# Altium PCB PCB_chushi_waigou_3_2022-06-16.pcbdoc
Units mil, origin at the board's own origin, x right, y up, seen from the top; angles counter-clockwise.
Board outline 3937 x 3149.6 mil, 2 copper layers (Top Layer, Bottom Layer); 26 components, 19 nets, 120 pads, 14 vias.
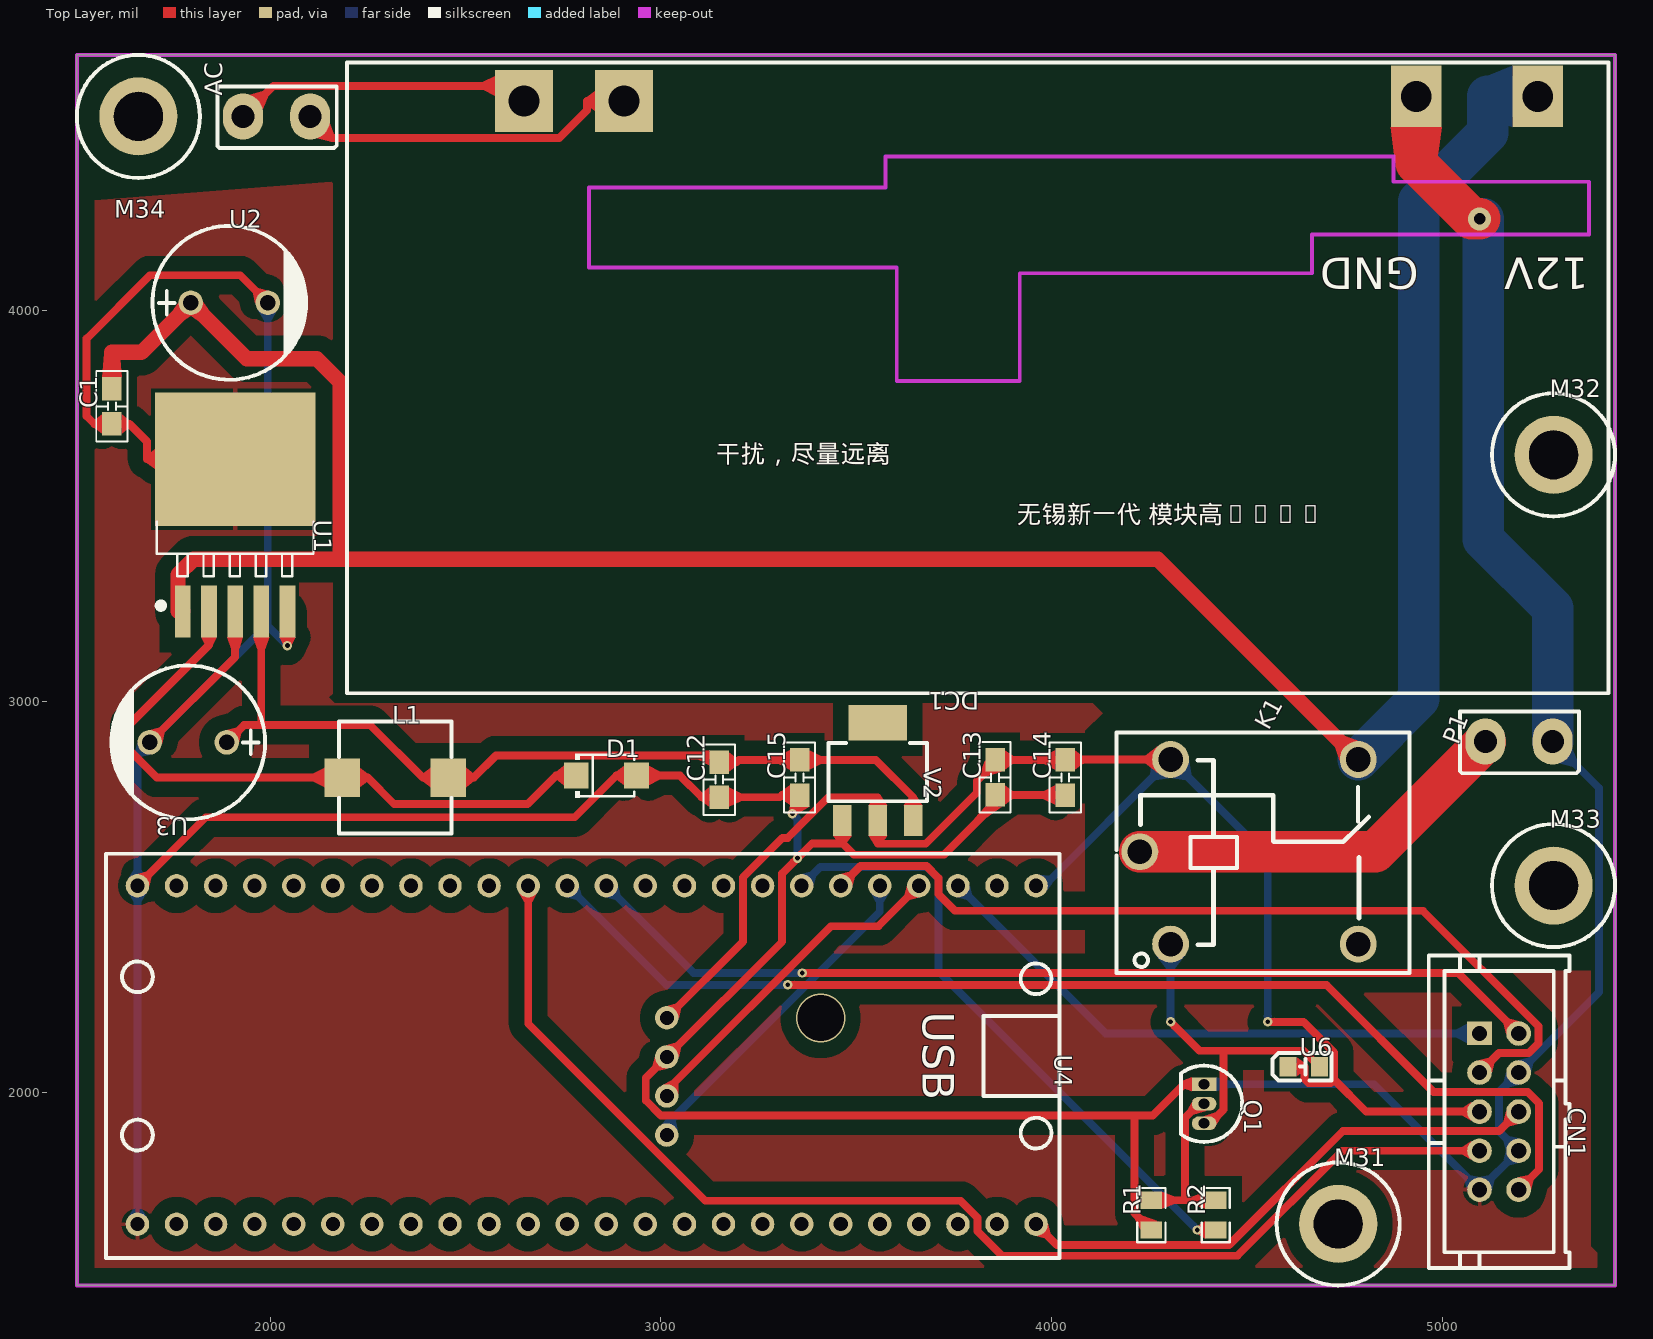
[diagram p0: Top Layer view]
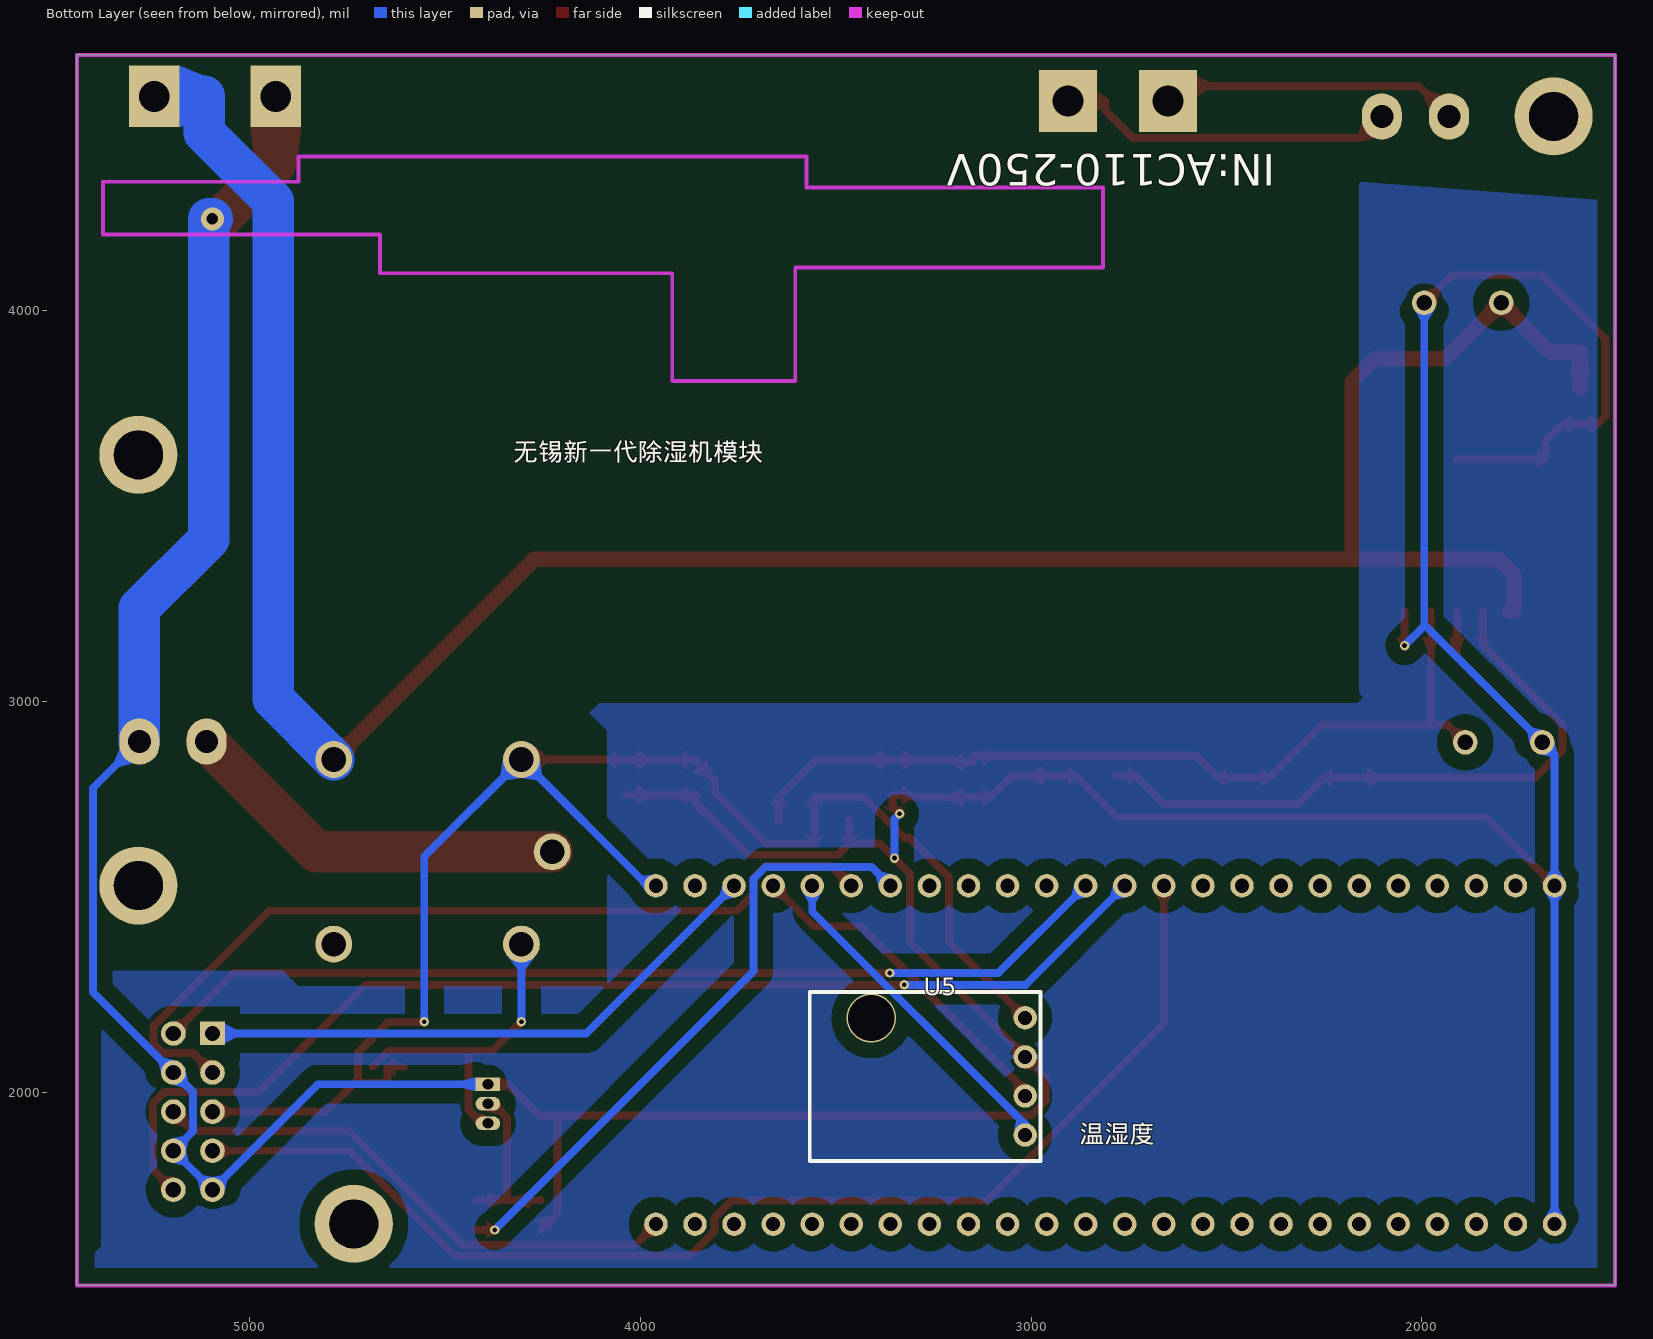
[diagram p1: Bottom Layer view, seen from below]

## Layer stack, top to bottom
Top Solder: solder mask 0.4, Solder Resist, Dk 3.5
Top Layer: signal copper 1.4
Dielectric1: dielectric 12.6, FR-4, Dk 4.8
Bottom Layer: signal copper 1.4
Bottom Solder: solder mask 0.4, Solder Resist, Dk 3.5

## Board outline
1505,1505 1505,4654.6 5442,4654.6 5442,1505

## Design rules (kind name [scope] priority, off if disabled: settings)
Clearance [InPoly] p1: gap=40 ignorepadtopadclearanceinfootprint=FALSE except(0: Arc-Hole Track-Hole SMDPad-Hole THPad-Hole Via-Hole Fill-Hole Poly-Hole Region-Hole Text-Hole)
PolygonConnect [All] p1: connectstyle=Relief reliefconductorwidth=10 reliefentries=4 polygonreliefangle="90 Angle" airgapwidth=10
RoutingVias [All] p1: holewidth=28 width=50 viastyle="Through Hole" minholewidth=28 minwidth=50 maxholewidth=28 maxwidth=50
SolderMaskExpansion [All] p1: expansion=4 istentingtop=FALSE
Width [All] p1: maxlimit=10 minlimit=10 preferedwidth=10
30 further rules are at their usual default settings.

## Components (designator, comment, footprint, x,y, rotation, side; value= is the part's Value field where it differs from the comment)
AC "220V" OUT 1930,4495 r90 top
C1 "0.1uF" 0805-C 1595,3710 r90 top
C12 "10uF" 0805-C 3149.46,2754.63 r90 top
C13 "10uF" 0805-C 3855.45,2760.37 r90 top
C14 "0.1uF" 0805-C 4035,2760 r90 top
C15 "0.1uF" 0805-C 3355,2760 r90 top
CN1 "5103308-1" IDC-TH_5103308-1 5145,1950 r270 top
D1 "SS54LF" SMAF_L3.5-W2.6-LS4.7-RD 2860,2810 r0 top
DC1 "电源19005" ?#1 5425,4635 r180 top
K1 "SRD-03VDC-SL-C_C496430" RELAY-TH_SRD-03VDC-SL-C 4505,2615 r0 top
L1 "CD74R-33UH" IND-SMD_L7.3-W7.3 2320,2805 r0 top
M31 "NO" M3X8+6_L 4733.34,1662.48 r0 top
M32 "NO" M3X8+6_L 5284.52,3630.98 r0 top
M33 "NO" M3X8+6_L 5284.52,2528.62 r0 top
M34 "NO" M3X8+6_L 1662.48,4497.12 r0 top
P1 "12V用电器" OUT 5110,2895 r90 top
Q1 "S8050-TA" TO-92-3_L4.9-W3.7-P1.27-L 4390,1970 r270 top
R1 "10kΩ" R0805 4255,1685 r90 top
R2 "1kΩ" R0805 4420,1685 r90 top
U1 "LM2596S-5.0/TR_C459077" TO-263-5_L10.1-W8.7-P1.70-LS14.4-BR 1910,3425 r270 top
U2 "电解电容/680UF" CAP-TH_BD10.0-P5.00-D0.6-FD 1895,4020 r0 top
U3 "电解电容/220UF" CAP-TH_BD10.0-P5.00-D0.6-FD 1790,2895 r180 top
U4 "W806核心板" ?#2 3960,2095 r270 top
U5 "NO" AHT10 3015,2040 r0 bottom
U6 "0805LED_G" LED-SMD_L2.0-W1.3-R-RD 4645,2065 r0 top
V2 "AMS1117-3V3" PG-SOT223-4_L6.5-W3.5-P2.30-LS7.0-BR 3555,2820 r270 top

## Footprints (in the part's own frame and the unit in brackets; to place one, negate y for a bottom-side part, rotate by r counter-clockwise, add the part's x,y. Pads: shape width x height; smd on the part's side, far side on the other; paste and mask are expansions set on the pad)
0805-C [mil]
  rect 60x50 smd: 1(0.08,0.45) 2(90.08,0.45)
  silkscreen extent -45,-40 135,40
AHT10 [mil]
  round 60 hole 36: 1(0,-150) 2(0,-50) 3(0,50) 4(0,150)
  silkscreen extent -39,-217 551,217
CAP-TH_BD10.0-P5.00-D0.6-FD [mm]
  round 1.6 hole 1: 1(-2.5,0) 2(2.5,0)
  silkscreen extent -5,-5 5.08,5
IDC-TH_5103308-1 [mm]
  rect 1.524x1.6 hole 1: 1(-5.08,-1.27)
  round 1.6 hole 1: 2(-5.08,1.27) 3(-2.54,-1.27) 4(-2.54,1.27) 5(0,-1.27) 6(0,1.27) 7(2.54,-1.27) 8(2.54,1.27) 9(5.08,-1.27) 10(5.08,1.27)
  silkscreen extent -10.16,-4.57 10.16,4.57
IND-SMD_L7.3-W7.3 [mm]
  rect 2.3x2.5 smd: 1(-3.45,0) 2(3.45,0)
  silkscreen extent -3.65,-3.65 3.65,3.65
LED-SMD_L2.0-W1.3-R-RD [mm]
  rect 1.1x1.25 smd: 1(1.016,0) 2(-1.016,0)
  silkscreen extent -2.03,-0.89 1.8,0.89
M3X8+6_L [mil]
  round 200 hole 125 slot 125.2 at 0 deg: 1(0,0)
  silkscreen extent -158,-157 157,157
OUT [mm]
  oval 3x2.6 hole 1.5: GND(0.051,-4.369) VCC(0.051,0)
  silkscreen extent -2.01,-6.1 2.01,1.65
PG-SOT223-4_L6.5-W3.5-P2.30-LS7.0-BR [mm]
  rect 2x1.2 smd: 1(3.175,-2.3) 2(3.175,0) 3(3.175,2.3)
  rect 2.3x3.8 smd: 4(-3.175,0)
  silkscreen extent -1.87,-3.2 1.93,3.2
R0805 [mil]
  rect 44.59x54.21 smd: 1(-38.04,0) 2(38.04,0)
  silkscreen extent -69,-36 69,36
RELAY-TH_SRD-03VDC-SL-C [mm]
  round 2.4 hole 1.6: 1(-5.1,-6) 2(7.1,-6) 3(7.1,6) 4(-5.1,6) 5(-7.1,0)
  silkscreen extent -8.61,-7.87 10.44,7.75
SMAF_L3.5-W2.6-LS4.7-RD [mm]
  rect 1.6x1.7 smd: 1(-1.96,0) 2(1.96,0)
  silkscreen extent -2.01,-1.43 1.83,1.42
TO-92-3_L4.9-W3.7-P1.27-L [mm]
  rect 0.9x1.6 hole 0.7: 1(-1.27,0)
  oval 0.9x1.6 hole 0.7: 2(0,0) 3(1.27,0)
  silkscreen extent -2.48,-1.5 2.48,2.48
TO-263-5_L10.1-W8.7-P1.70-LS14.4-BR [mm]
  rect 3.359x1.02 smd: 1(4.948,-3.4) 2(4.948,-1.7) 3(4.948,0) 4(4.948,1.7) 5(4.948,3.4)
  rect 8.7x10.431 smd: 6(-4.948,0)
  silkscreen extent -0.88,-5.09 4.77,5.09
?#1 [mm]
  rect 3.8x4 smd: 1(70.5,2.5) 2(64,2.5)
  rect 3.8x4 smd far side: 1(70.5,2.5) 2(64,2.5)
  rect 3.3x4 smd: 3(4.6,2.2) 4(12.5,2.2)
  rect 3.3x4 smd far side: 3(4.6,2.2) 4(12.5,2.2)
  Keep-Out Layer lines w0.254: 66.271,13.335 66.271,8.128 46.99,8.128 46.99,6.096 13.97,6.096 13.97,7.747 1.27,7.747 1.27,11.176 19.271,11.176 19.271,13.698 38.27,13.698 38.27,20.698 46.271,20.698 46.271,13.335 66.271,13.335
  silkscreen extent 0,0 82,41
?#2 [mm]
  round 1.524 hole 0.914: 1(-11,0) 2(-11,-2.54) 3(-11,-5.08) 4(-11,-7.62) 5(-11,-10.16) 6(-11,-12.7) 7(-11,-15.24) 8(-11,-17.78) 9(-11,-20.32) 10(-11,-22.86) 11(-11,-25.4) 12(-11,-27.94) 13(-11,-30.48) 14(-11,-33.02) 15(-11,-35.56) 16(-11,-38.1) 17(-11,-40.64) 18(-11,-43.18) 19(-11,-45.72) 20(-11,-48.26) 21(-11,-50.8) 22(-11,-53.34) 23(-11,-55.88) 24(-11,-58.42) 25(11,-58.42) 26(11,-55.88) 27(11,-53.34) 28(11,-50.8) 29(11,-48.26) 30(11,-45.72) 31(11,-43.18) 32(11,-40.64) 33(11,-38.1) 34(11,-35.56) 35(11,-33.02) 36(11,-30.48) 37(11,-27.94) 38(11,-25.4) 39(11,-22.86) 40(11,-20.32) 41(11,-17.78) 42(11,-15.24) 43(11,-12.7) 44(11,-10.16) 45(11,-7.62) 46(11,-5.08) 47(11,-2.54) 48(11,0)
  silkscreen extent -13.08,-60.45 13.21,1.52

## Via types
v1: diameter 24.02, hole 12.01, Top Layer to Bottom Layer, 8 vias
v2: diameter 98.43, hole 78.74, Top Layer to Bottom Layer, 4 vias
v3: diameter 125.98, hole 118.11, Top Layer to Bottom Layer, 1 vias
v4: diameter 59.06, hole 29.53, Top Layer to Bottom Layer, 1 vias

## Nets (pads, with @x,y where several pads share a name; then routed paths per layer and width w, separated by ;. In a path a pad name is that pad's centre, name@x,y a point inside that pad or via, vN(x,y) a via of type N, cw(c..) or ccw(c..) an arc to the next point about the centre after c; other vN are vias at no path point)
3.3V: C13.2 C14.2 CN1.5 K1.4 U4.1 U5.1 U6.2 V2.2 | length 3955.7
  Top Layer w20: U5.1 3209.99,2384.99 3209.99,2549.44 3311.14,2650.59 3324.53,2650.59 3428.34,2754.4 3555,2754.4 3555,2716.21 V2.2 3555,2635.6 3677.79,2635.6 3808,2765.81 3808,2795.87 3862.58,2850.45 C13.2@3877.52,2850.45 ; C13.2@3855,2850.45 C13.2@3877.52,2850.45 ; K1.4 4080.72,2851.22 4079.58,2850.08 4057.07,2850.08 C14.2 3900.4,2850.08 3900.03,2850.45 C13.2@3877.52,2850.45 ; v1(4552.71,2179.7) 4644.24,2179.7 4722.71,2101.23 4722.71,2032.12 ; U6.2 4646.68,2065 4646.68,2033.74 4657.61,2022.81 4713.4,2022.81 4722.71,2032.12 ; CN1.5 4804.83,1950 4722.71,2032.12
  Bottom Layer w20: U4.1 3981.07,2528.07 K1.4 4552.71,2602.73 v1(4552.71,2179.7)
12V: C1.2 DC1.3 K1.3 U1.1 U2.1 | length 6585.6
  Top Layer w39.37: C1.2 1594.55,3893.26 1669.84,3893.26 U2.1 1939.35,3877.23 2118.72,3877.23 2178.51,3817.44 2178.51,3363.68 ; U1.1 1763.78,3230.19 1763.8,3324.2 1803.3,3363.7 2178.5,3363.7 ; K1.3 4272.07,3363.68 2178.51,3363.68
  Bottom Layer w106.3: K1.3 4940,3006.7 4940,4280 5115.8,4455.8 5115.8,4548.4 ; 5115.76,4548.38 v2(5243.9,4548.39)
CLK: CN1.1 U4.3 | length 1491.6
  Bottom Layer w20: U4.3 4138.07,2150 CN1.1
DIO: CN1.3 U4.6 | length 2226
  Top Layer w20: U4.6 3510.64,2578.71 3679.36,2578.71 3710,2548.07 3710,2506.78 3752.65,2464.13 4949.97,2464.13 5245.74,2168.36 5245.74,2125.01 5220.73,2100 5145,2100 CN1.3
DOWN: CN1.10 U4.13 | length 2960.9
  Top Layer w20: v1(3324.66,2274.29) 4703.03,2274.29 4977.32,2000 5218.38,2000 5247.44,1970.94 5247.44,1802.44 CN1.10
  Bottom Layer w20: U4.13 3013.78,2274.29 v1(3324.66,2274.29)
GND: C1.1 C12.1 C13.1 C14.1 C15.1 CN1.4 CN1.8 CN1.9 D1.2 DC1.4 P1.GND Q1.1 R1.1 U1.3 U1.5 U1.6 U2.2 U3.2 U4.24 U4.25 U5.2 V2.1 | length 13727
  Top Layer w20: U4.24 1835.16,2703.23 2778.87,2703.23 2885.64,2810 D1.2 3048.69,2810 3103.98,2754.71 C12.1 3304.15,2754.71 3309.52,2760.08 C15.1 3354.55,2730.17 v1(3336.33,2711.95) ; U3.2 1910,3113.43 U1.3 ; U1.6 1684.63,3619.82 1684.63,3665.03 1639.58,3710.08 1617.07,3710.08 C1.1 1549.52,3710.08 1530,3729.6 1530,3928.4 1692.3,4090.7 1922.7,4090.7 U2.2 ; v1@2043.86,3142.81 U1.5 ; V2.1 3464.45,2636.57 ; C13.1@3855,2760.45 C13.1@3877.52,2760.45 ; C14.1 3900.4,2760.08 3900.03,2760.45 C13.1@3877.52,2760.45 ; R1.1 4211.83,1690.13 4211.83,1940 ; Q1.1 4338.47,2020 4258.47,1940 4211.83,1940 ; 3464.45,2636.57 3493.86,2607.16 3724.23,2607.16 C13.1@3877.52,2760.45 ; 3464.45,2636.57 3387.14,2636.57 v1(3349.42,2598.85) 3310,2559.43 3310,2385 U5.2 2961.06,2036.06 2961.06,1978.65 2999.71,1940 4211.83,1940
  Top Layer w106.3: v2(4932.87,4548.39) 4932.87,4377.13 5075,4235 v4(5095,4235)
  Bottom Layer w20: U4.25 U4.24 1660,2863.43 U3.2 1991.62,3195.05 ; U2.2 1993.43,3196.86 1991.62,3195.05 ; v1(2043.85,3142.81) 1991.62,3195.05 ; v1(3336.33,2711.95) 3349.42,2698.86 v1(3349.42,2598.85) ; Q1.1 4825,2020 CN1.9 CN1.8 5145,1900 5145,2000 CN1.4 5401.07,2256.07 5401.07,2777.93 P1.GND
  Bottom Layer w106.3: v4(5095,4235) 5105,4235 5105,3415 5282,3238 P1.GND
K1_1: K1.1 Q1.3 U6.1 | length 842.3
  Top Layer w20: v1(4304.22,2179.7) 4378.25,2105.67 4439.77,2105.67 ; Q1.3 4404.75,1920 4439.77,1955.02 4439.77,2105.67 ; U6.1 4644.33,2105.67 4439.77,2105.67
  Bottom Layer w20: v1(4304.22,2179.7) K1.1
K1_5: K1.5 P1.VCC | length 1001.3
  Top Layer w106.3: K1.5 4828,2615 P1.VCC
OK: CN1.7 U4.14 | length 3166
  Top Layer w20: U4.14 2660,2174.85 3113.17,1721.68 3766.77,1721.68 3810,1678.45 3810,1643.81 3872.94,1580.87 4475.24,1580.87 4744.37,1850 CN1.7
P2_GND: AC.GND DC1.2 | length 879.4
  Top Layer w20: AC.GND 2157.23,4441.77 2739.4,4441.77 2810.49,4512.86 2810.49,4536.57 2857.91,4536.57 v2(2905.32,4536.58)
P2_VCC: AC.VCC DC1.1 | length 767.9
  Top Layer w20: AC.VCC 2008.3,4575.3 2610.69,4575.3 v2(2649.41,4536.58)
Q1_2: Q1.2 R1.2 R2.2 | length 439.7
  Top Layer w20: R1.2 4341.22,1723.04 ; Q1.2 4377.22,1970 4341.22,1934 4341.22,1723.04 ; R2.2 4341.22,1723.04
RST: CN1.6 U4.48 | length 1398.5
  Top Layer w20: U4.48 4013.32,1608.61 4453.76,1608.61 4745.15,1900 5145,1900 CN1.6
U1_2: D1.1 L1.1 U1.2 | length 1670
  Top Layer w20: U1.2 1843.07,3144.05 1639.81,2940.79 1639.81,2874.69 1709.5,2805 L1.1 2249.48,2805 2317.46,2737.02 2658.33,2737.02 2731.31,2810 D1.1
U4_7: R2.1 U4.7 | length 1603.1
  Top Layer w20: v1(4372.86,1646.96) R2.1
  Bottom Layer w20: U4.7 3408.37,2576.44 3679.12,2576.44 3710,2545.56 3710,2309.82 v1(4372.86,1646.96)
U5_3: U4.4 U5.3 | length 876.3
  Top Layer w20: U5.3 3015,2004.31 3435.15,2424.46 3556.39,2424.46 U4.4
U5_4: U4.5 U5.4 | length 863.8
  Bottom Layer w20: U5.4 3015,1916.78 3560,2461.78 U4.5
UP: CN1.2 U4.12 | length 2491.6
  Top Layer w20: v1(3361.53,2304.61) 5040.39,2304.61 CN1.2
  Bottom Layer w20: U4.12 3083.46,2304.61 v1(3361.53,2304.61)
V2_3: C12.2 C15.2 L1.2 U1.4 U3.1 V2.3 | length 2267.7
  Top Layer w20: U3.1 1932.68,2939.26 1976.93,2939.26 ; U1.4 1976.93,2939.26 ; C12.2 C12.2@3163.04,2844.71 ; V2.3 3645.55,2754.4 3549.87,2850.08 C15.2 3199.41,2850.08 3194.04,2844.71 C12.2@3163.04,2844.71 ; 1976.93,2939.26 2256.26,2939.26 2390.52,2805 2423.18,2805 L1.2 2521.14,2805 2577.75,2861.61 3146.14,2861.61 C12.2@3163.04,2844.71
pads on no net: K1.2 M31.1 M32.1 M33.1 M34.1 U4.2 U4.8 U4.9 U4.10 U4.11 U4.15 U4.16 U4.17 U4.18 U4.19 U4.20 U4.21 U4.22 U4.23 U4.26 U4.27 U4.28 U4.29 U4.30 U4.31 U4.32 U4.33 U4.34 U4.35 U4.36 U4.37 U4.38 U4.39 U4.40 U4.41 U4.42 U4.43 U4.44 U4.45 U4.46 U4.47 V2.4
copper on no net:
  other v3: 3408.7,2189.61

## Polygon pours and split planes (outlines as drawn)
GND on Top Layer "GND_L01_P000" (solid, pour order 0): 1510,4280 1530,4260 1530,1520 5365,1520 5415,1570 5380,1605 5380,2310 4915,2310 4875,2270 4085,2270 4085,2925 4130,2970 4105,2995 2165,2995 2150,3010 2160,3020 2160,4330
GND on Bottom Layer "GND_L02_P001" (solid, pour order 1): 1510,4280.29 1530,4260.29 1530,1520.29 5365,1520.29 5415,1570.29 5380,1605.29 5380,2310.29 4915,2310.29 4875,2270.29 4085,2270.29 4085,2925.29 4130,2970.29 4105,2995.29 2165,2995.29 2150,3010.29 2160,3020.29 2160,4330.29

## Other copper
Top Layer:
  region net UP: 5163.57,2148.03 5196.97,2181.43 5171.75,2187.39 5157.61,2173.25
  region net DIO: 5093.03,2081.43 5126.43,2048.03 5132.39,2073.25 5118.25,2087.39
  region net 3.3V: 5074.17,1926.38 5074.17,1973.62 5052.12,1960 5052.12,1940
  region net RST: 5163.57,1951.97 5196.97,1918.57 5171.75,1912.61 5157.61,1926.75
  region net OK: 5074.17,1826.38 5074.17,1873.62 5052.12,1860 5052.12,1840
  region net DOWN: 5193.03,1781.43 5226.43,1748.03 5232.39,1773.25 5218.25,1787.39
  region net 3.3V: 4272.97,2815.79 4272.97,2886.65 4239.9,2861.22 4239.9,2841.22
  region net 12V: 4787.49,2898.37 4737.37,2848.26 4725.13,2882.79 4752.97,2910.62
  region net GND: 1962,4018.03 1995.4,4051.43 1970.18,4057.39 1956.04,4043.25
  region net 12V: 1765.15,4021.97 1798.55,3988.57 1780.18,3975.76 1752.34,4003.6
  region net 12V: 1794.61,3988.57 1828.01,4021.97 1840.82,4003.6 1812.98,3975.76
  region net GND: 1689.6,2926.43 1723,2893.03 1728.96,2918.25 1714.82,2932.39
  region net V2_3: 1886.45,2926.43 1919.85,2893.03 1925.81,2918.25 1911.67,2932.39
  region net U5_3: 3630.06,2529.95 3661.88,2498.13 3638.19,2492.12 3624.05,2506.26
  region net DIO: 3458.12,2558.01 3489.94,2526.19 3495.95,2549.88 3481.81,2564.02
  region net OK: 2682.5,2508.23 2637.5,2508.23 2650,2487.23 2670,2487.23
  region net GND: 1658.12,2558.01 1689.94,2526.19 1695.95,2549.88 1681.81,2564.02
  region net RST: 3958.12,1631.99 3989.94,1663.81 3995.95,1640.12 3981.81,1625.98
  region net 3.3V: 3013.12,2219.94 3044.94,2188.12 3050.95,2211.81 3036.81,2225.95
  region net GND: 2985.06,2091.88 3016.88,2060.06 2993.19,2054.05 2979.05,2068.19
  region net GND: 3013.12,2119.94 3044.94,2088.12 3050.95,2111.81 3036.81,2125.95
  region net U5_3: 3044.47,1995.6 3005.76,2018.54 3026.95,2030.4 3044.7,2019.87
  region net P2_GND: 2872.78,4499.67 2872.77,4573.48 2838.32,4546.57 2838.32,4526.57
  region net P2_VCC: 2652.49,4585.7 2600.29,4533.5 2603.62,4568.23 2617.76,4582.37
  region net GND: 2052.86,3150.75 2034.85,3150.76 2033.86,3159.16 2053.86,3159.15
  region net GND: 3348.31,2711.2 3335.58,2723.94 3340.82,2730.58 3354.96,2716.44
  region net GND: 3361.4,2598.1 3348.67,2610.83 3353.91,2617.48 3368.05,2603.34
  region net GND: 3350.17,2586.87 3337.43,2599.6 3330.79,2594.36 3344.93,2580.22
  region net 3.3V: 4560.65,2170.69 4560.65,2188.71 4569.06,2189.7 4569.06,2169.7
  region net UP: 3369.47,2295.6 3369.47,2313.62 3377.88,2314.61 3377.88,2294.61
  region net DOWN: 3332.6,2265.28 3332.6,2283.3 3341.01,2284.29 3341.01,2264.29
  region net K1_1: 4316.2,2180.45 4303.47,2167.72 4308.71,2161.07 4322.85,2175.21
  region net U4_7: 4380.8,1637.95 4380.8,1655.97 4389.21,1656.96 4389.21,1636.96
  region net GND: 1619.55,3735.08 1619.55,3685.08 1639.58,3700.08 1639.58,3720.08
  region net GND: 1569.55,3685.08 1569.55,3735.08 1549.52,3720.08 1549.52,3700.08
  region net 12V: 1569.55,3830.08 1619.55,3830.08 1614.24,3889.14 1574.87,3889.14
  region net GND: 3174.01,2779.71 3174.01,2729.71 3204.01,2744.71 3204.01,2764.71
  region net GND: 3124.01,2729.71 3124.01,2779.71 3103.98,2764.71 3103.98,2744.71
  region net V2_3: 3174.01,2869.71 3174.01,2819.71 3194.04,2834.71 3194.04,2854.71
  region net V2_3: 3124.01,2836.61 3124.01,2874.71 3094.01,2871.61 3094.01,2851.61
  region net GND: 3880,2785.45 3880,2735.45 3900.03,2750.45 3900.03,2770.45
  region net GND: 3872.52,2730.45 3830,2730.45 3803.38,2700.45 3831.66,2700.45
  region net 3.3V: 3880,2875.45 3880,2825.45 3900.03,2840.45 3900.03,2860.45
  region net 3.3V: 3871.12,2820.45 3830,2848.9 3818.42,2820.43 3835.14,2808.87
  region net GND: 4009.55,2735.08 4009.55,2785.08 3979.55,2770.08 3979.55,2750.08
  region net 3.3V: 4059.55,2875.08 4059.55,2825.08 4079.58,2840.08 4079.58,2860.08
  region net 3.3V: 4009.55,2825.08 4009.55,2875.08 3979.55,2860.08 3979.55,2840.08
  region net GND: 3329.55,2735.08 3329.55,2785.08 3309.52,2770.08 3309.52,2750.08
  region net GND: 3379.46,2730.08 3329.55,2730.08 3329.26,2719.02 3350.47,2711.95
  region net V2_3: 3379.55,2875.08 3379.55,2825.08 3409.55,2840.08 3409.55,2860.08
  region net V2_3: 3329.55,2825.08 3329.55,2875.08 3299.55,2860.08 3299.55,2840.08
  region net GND: 2968.66,2835 2968.66,2785 2998.66,2800 2998.66,2820
  region net GND: 2905.67,2785 2905.67,2835 2885.64,2820 2885.64,2800
  region net U1_2: 2751.34,2785 2751.34,2835 2731.31,2820 2731.31,2800
  region net GND: 4997.83,4469.64 4867.91,4469.64 4879.72,4377.13 4986.02,4377.13
  region net P2_GND: 2830.52,4511.57 2830.52,4561.57 2810.49,4546.57 2810.49,4526.57
  region net P2_VCC: 2574.61,4550.3 2574.61,4600.3 2544.61,4585.3 2544.61,4565.3
  region net V2_3: 2410.55,2780 2410.55,2830 2390.52,2815 2390.52,2795
  region net V2_3: 2501.11,2830 2501.11,2780 2521.14,2795 2521.14,2815
  region net U1_2: 2138.89,2780 2138.89,2830 2108.89,2815 2108.89,2795
  region net U1_2: 2229.45,2830 2229.45,2780 2249.48,2795 2249.48,2815
  region net GND: 4358.51,2002.28 4358.51,2037.71 4338.47,2030 4338.47,2010
  region net Q1_2: 4282.1,1745.34 4282.1,1700.75 4312.1,1713.04 4312.1,1733.04
  region net GND: 4227.9,1647.17 4272.76,1669.25 4232.99,1683.12 4214.03,1673.79
  region net Q1_2: 4392.9,1700.75 4392.9,1745.34 4362.9,1733.04 4362.9,1713.04
  region net U4_7: 4392.9,1669.25 4392.9,1624.66 4372.86,1636.96 4372.86,1656.96
  region net GND: 1704.66,3594.82 1704.66,3644.82 1684.63,3629.82 1684.63,3609.82
  region net GND: 2023.78,3164.08 2063.94,3164.08 2053.86,3142.81 2033.86,3142.81
  region net V2_3: 1956.85,3164.08 1997.01,3164.08 1986.93,3134.08 1966.93,3134.08
  region net GND: 1889.92,3164.08 1930.08,3164.08 1920,3134.08 1900,3134.08
  region net U1_2: 1822.99,3164.08 1863.15,3164.08 1853.07,3144.05 1833.07,3144.05
  region net 3.3V: 4626.66,2040.39 4626.66,2089.61 4646.68,2075 4646.68,2055
  region net 3.3V: 3531.38,2734.37 3578.62,2734.37 3565,2754.4 3545,2754.4
  region net 3.3V: 3578.62,2655.63 3531.38,2655.63 3545,2635.6 3565,2635.6
  region net V2_3: 3621.93,2734.37 3669.17,2734.37 3655.55,2754.4 3635.55,2754.4
  region net GND: 3488.07,2655.63 3440.83,2655.63 3454.45,2636.57 3474.45,2636.57
  region net K1_5: 5161.18,2889.13 5058.82,2904.87 4962.07,2824.23 5031.86,2743.7
  region net P2_GND: 2152.18,4479.03 2119.63,4441.08 2150.7,4434.16 2163.76,4449.38
  region net P2_VCC: 1980.16,4515.06 1947.54,4552.96 1980.04,4561.18 1993.12,4545.98
  region net K1_1: 4388.65,1937.72 4415.29,1906.53 4432.95,1934.06 4419.34,1948.73
  region net Q1_2: 4396.27,1952.28 4362.95,1981.73 4347.75,1954.67 4362.89,1941.53
Bottom Layer:
  region net GND: 5193.03,2081.43 5226.43,2048.03 5232.39,2073.25 5218.25,2087.39
  region net GND: 5163.57,2051.97 5196.97,2018.57 5171.75,2012.61 5157.61,2026.75
  region net GND: 5163.57,1851.97 5196.97,1818.57 5171.75,1812.61 5157.61,1826.75
  region net GND: 5163.57,1848.03 5196.97,1881.43 5171.75,1887.39 5157.61,1873.25
  region net GND: 5063.57,1748.03 5096.97,1781.43 5071.75,1787.39 5057.61,1773.25
  region net GND: 5093.03,1781.43 5126.43,1748.03 5132.39,1773.25 5118.25,1787.39
  region net 3.3V: 4351.37,2854.18 4301.26,2804.07 4342.63,2798.67 4356.77,2812.81
  region net 3.3V: 4307.18,2804.07 4257.07,2854.18 4251.67,2812.81 4265.81,2798.67
  region net K1_1: 4339.65,2347.53 4268.79,2347.53 4294.22,2314.46 4314.22,2314.46
  region net GND: 2017.05,3999.17 1969.81,3999.17 1983.43,3977.12 2003.43,3977.12
  region net GND: 1689.6,2926.43 1723,2893.03 1728.96,2918.25 1714.82,2932.39
  region net GND: 1660.14,2896.97 1693.54,2863.57 1668.32,2857.61 1654.18,2871.75
  region net 3.3V: 3987.19,2515.4 3969.17,2556.63 3993.12,2554.27 4001.73,2534.58
  region net CLK: 3758.12,2498.13 3789.94,2529.95 3795.95,2506.26 3781.81,2492.12
  region net U5_4: 3582.5,2508.23 3537.5,2508.23 3550,2487.23 3570,2487.23
  region net U4_7: 3358.12,2558.01 3389.94,2526.19 3395.95,2549.88 3381.81,2564.02
  region net UP: 2858.12,2498.13 2889.94,2529.95 2895.95,2506.26 2881.81,2492.12
  region net DOWN: 2758.12,2498.13 2789.94,2529.95 2795.95,2506.26 2781.81,2492.12
  region net GND: 1682.5,2547.91 1637.5,2547.91 1650,2568.91 1670,2568.91
  region net GND: 1682.5,2508.23 1637.5,2508.23 1650,2487.23 1670,2487.23
  region net GND: 1682.5,1681.77 1637.5,1681.77 1650,1702.77 1670,1702.77
  region net U5_4: 3042.4,1902.22 2999.45,1915.66 3016.43,1932.35 3037.97,1925.61
  region net GND: 2044.6,3154.79 2031.87,3142.06 2025.22,3147.3 2039.36,3161.44
  region net GND: 3348.31,2712.7 3335.58,2699.97 3340.82,2693.32 3354.96,2707.46
  region net GND: 3340.41,2606.79 3358.42,2606.79 3359.42,2615.2 3339.42,2615.2
  region net 3.3V: 4543.7,2187.64 4561.72,2187.64 4562.71,2196.05 4542.71,2196.05
  region net UP: 3353.59,2295.6 3353.59,2313.62 3345.18,2314.61 3345.18,2294.61
  region net DOWN: 3316.72,2265.28 3316.72,2283.3 3308.31,2284.29 3308.31,2264.29
  region net K1_1: 4295.21,2187.64 4313.22,2187.64 4314.22,2196.05 4294.22,2196.05
  region net U4_7: 4373.61,1658.94 4360.88,1646.21 4354.23,1651.45 4368.37,1665.59
  region net CLK: 5063.5,2125 5063.5,2175 5033.5,2160 5033.5,2140
  region net 12V: 5178.94,4469.64 5178.94,4627.12 5115.76,4601.53 5115.76,4495.23
  region net GND: 4421.49,2037.71 4421.49,2002.28 4451.49,2010 4451.49,2030
  region net GND: 5332.16,2878.94 5299.54,2841.04 5332.04,2832.82 5345.13,2848.02

## Silkscreen, mask and mechanical layers (free items; w line width, h text height)
Bottom Overlay:
  text "无锡新一代除湿机模块" at 4325,3600 h80

## Text inside footprints (layer, text, board x,y; h text height)
DC1: Bottom Overlay "IN:AC110-250V" at 2375,4400 h80 r180; Top Overlay "无锡新一代 模块高30mm" at 3910,3440 h80; Top Overlay "干扰，尽量远离" at 3140,3595 h80; Top Overlay "12V" at 5375,4135 h80 r180; Top Overlay "GND" at 4940,4135 h80 r180
U4: Top Overlay "USB" at 3670,2205 h80 r270
U5: Bottom Overlay "温湿度" at 2875,1855 h80